# Allegro board ECG.brd
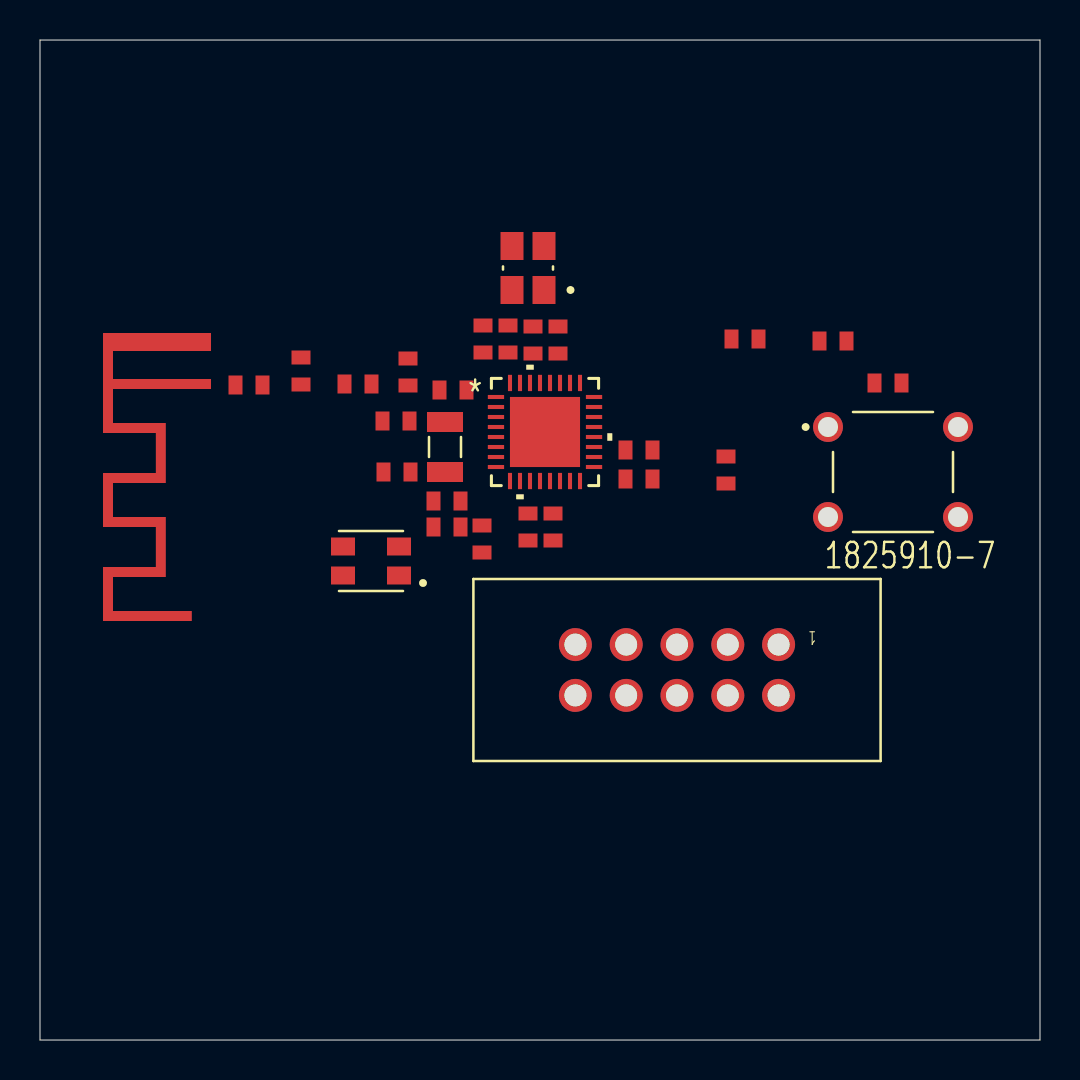
[diagram p0: board, top side]
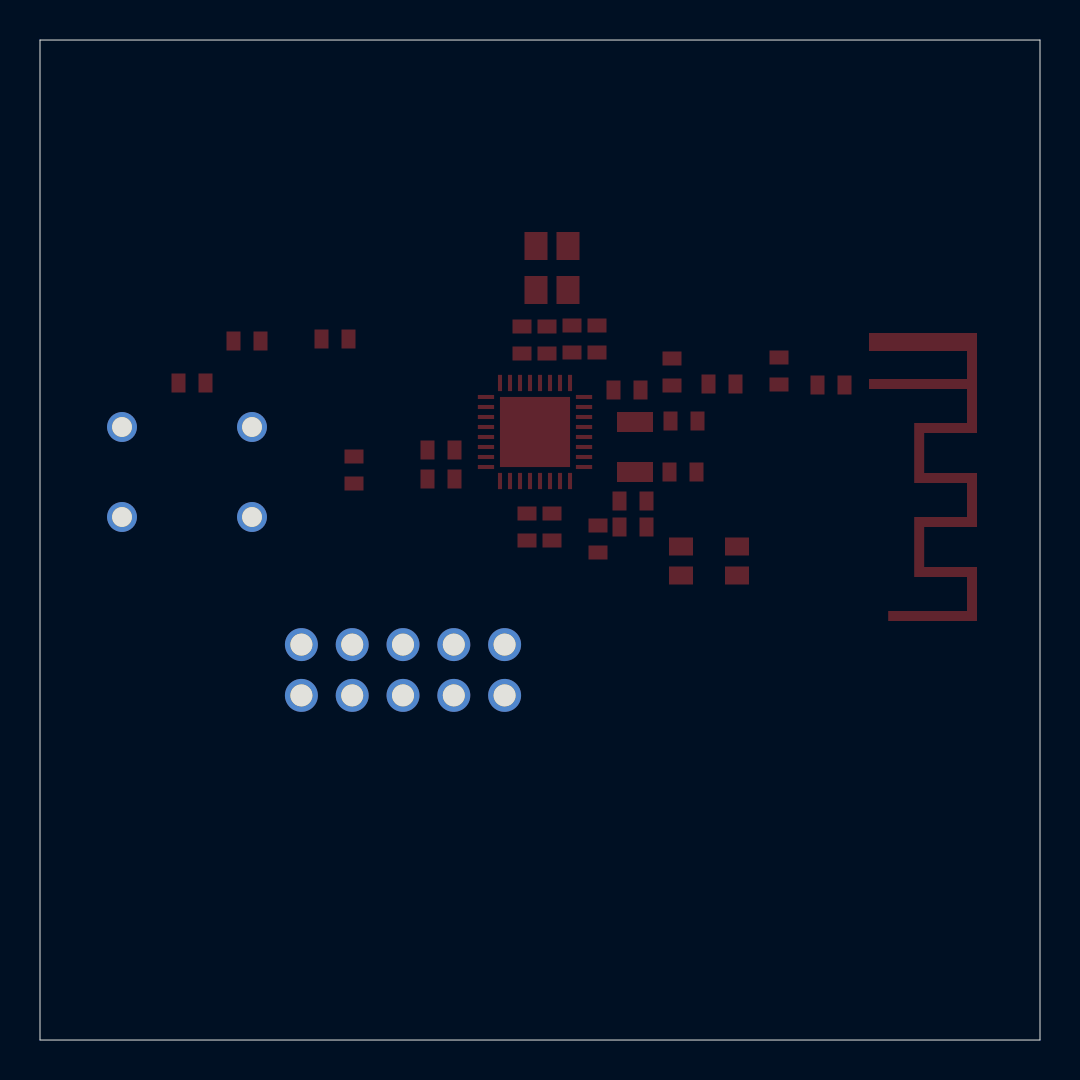
[diagram p1: board, bottom side, seen from below]

Outline 50 x 50 mm; copper layers: TOP, BOTTOM. Coordinates in mm from the lower left corner of the outline.
Outline path: 0,50 0,0 50,0 50,50 0,50

## Design rules (mm)
constraint set DEFAULT: min track width 0.127

## Placement (name value [footprint] x y rotation side)
A1  Anteena  [AN043_PATCH_ANTENNA]  8.05 35.85 90 top
C1  100nF  [0603_C]  39.65 34.95 0 top
C2  12 pF  [0603_C]  17.8 30.95 0 top
C3  12 pF  [0603_C]  17.85 28.4 0 top
C4  12 pF  [0603_C]  10.45 32.75 0 top
C5  1.2 pF  [0603_C]  18.4 33.4 270 top
C6  1.2 pF  [0603_C]  13.05 33.45 270 top
C7  1 uF  [0603_C]  25.65 25.65 90 top
C8  100 nF  [0603_C]  24.4 25.65 90 top
C9  100 nF  [0603_C]  25.9 35 270 top
C10  10 uF  [0603_C]  29.95 29.5 180 top
C11  100 nF  [0603_C]  34.3 28.5 90 top
C12  10 uF  [0603_C]  23.4 35.05 270 top
C13  100 nF  [0603_C]  24.65 35 270 top
C14  100 nF  [0603_C]  22.15 35.05 270 top
D1  RGB  [RGB_LED]  16.55 23.95 180 top
J1  5X5  [HEADER4X2]  31.85 18.5 180 top
L1  15 nH  [0603_L]  20.65 32.5 0 top
L2  2 nH  [0603_L]  15.9 32.8 180 top
L3  10 uH  [0603_L]  29.95 28.05 0 top
R1  330  [0603_R]  20.35 26.95 180 top
R2  570  [0603_R]  22.1 25.05 270 top
R3  750  [0603_R]  20.35 25.65 180 top
R4  10k  [0603_R]  35.25 35.05 0 top
R5  330  [0603_R]  42.4 32.85 0 top
S2  1825910-7  [SW_PB]  42.65 28.4 0 top
U1  CC2640R2LRHBR  [CC2640]  25.25 30.4 0 top
Y1  TSX-3225_240000MF20X-AC0  [XTAL_24MHZ]  24.4 38.6 180 top
Y2  FC-135R_327680KA-AG0  [XTAL_32_768KHZ]  20.25 29.65 270 top

## Library data of the parts
A1 = Anteena_0
C1 = C
C2-C14 = Capacitor
D1 = XZM2CRKM2DGFBB45SCCB
J1 = 5X5
L1-L3 = Inductor
R1-R5 = R
S2 = 1825910-7
U1 = CC2640R2LRHBR: User Part Number: PN; Tolerance: TOL
Y1 = TSX-3225_240000MF20X-AC0
Y2 = FC-135R_327680KA-AG0

## Footprints (pads in the part's own frame, mm; a bottom-side part is the same pattern mirrored in y, then rotated)
0603_C
  rect 0.7x0.95 smd: 1(-0.675,0) 2(0.675,0)
0603_L
  rect 0.7x0.95 smd: 1(-0.675,0) 2(0.675,0)
0603_R
  rect 0.7x0.95 smd: 1(-0.675,0) 2(0.675,0)
AN043_PATCH_ANTENNA
  rect 0.9x0.5 smd: 1(-0.95,-0.25)
  rect 0.5x0.5 smd: 2(-3.05,-0.25)
CC2640
  rect 0.813x0.203 smd: 1(-2.451,1.75) 2(-2.451,1.25) 3(-2.451,0.75) 4(-2.451,0.25) 5(-2.451,-0.25) 6(-2.451,-0.75) 7(-2.451,-1.25) 8(-2.451,-1.75) 17(2.451,-1.75) 18(2.451,-1.25) 19(2.451,-0.75) 20(2.451,-0.25) 21(2.451,0.25) 22(2.451,0.75) 23(2.451,1.25) 24(2.451,1.75)
  rect 0.203x0.813 smd: 9(-1.75,-2.451) 10(-1.25,-2.451) 11(-0.75,-2.451) 12(-0.25,-2.451) 13(0.25,-2.451) 14(0.75,-2.451) 15(1.25,-2.451) 16(1.75,-2.451) 25(1.75,2.451) 26(1.25,2.451) 27(0.75,2.451) 28(0.25,2.451) 29(-0.25,2.451) 30(-0.75,2.451) 31(-1.25,2.451) 32(-1.75,2.451)
  rect 3.505x3.505 smd: 33(0,0)
HEADER4X2
  round 1.65 hole 1.1: 1(-5.08,-1.27) 2(-5.08,1.27) 3(-2.54,-1.27) 4(-2.54,1.27) 5(0,-1.27) 6(0,1.27) 7(2.54,-1.27) 8(2.54,1.27) 9(5.08,-1.27) 10(5.08,1.27)
RGB_LED
  rect 1.2x0.9 smd: 1(-1.4,0.725) 2(1.4,0.725) 3(1.4,-0.725) 4(-1.4,-0.725)
SW_PB
  round 1.498 hole 0.99: 1(-3.25,2.25) 2(3.25,2.25) 3(-3.25,-2.25) 4(3.25,-2.25)
XTAL_24MHZ
  rect 1.15x1.4 smd: 1(-0.8,1.1) 2(-0.8,-1.1) 3(0.8,-1.1) 4(0.8,1.1)
XTAL_32_768KHZ
  rect 1x1.8 smd: 1(-1.25,0) 2(1.25,0)

## Nets
3.3V: C8.2(B) C9.2(B) C10.2(B) C11.2(B) U1.11 U1.18 U1.28
GND: A1.1(GND) C1.2 C2.1 C3.1 C5.1 C6.1 C7.1 C8.1 C9.1 C10.1 C11.1 C12.1 C13.1 C14.1 D1.4 J1.1 J1.3 R4.1 S2.4 U1.33 Y1.2 Y1.4(GND#4)
VDD: J1.5
VDDR: C12.2(B) C13.2(B) C14.2(B) L3.2(B) U1.29 U1.32
DCDC_SW: L3.1 U1.17
DCOUPL: C7.2(B) U1.12
ECG: U1.21
JTAG_TCKC: J1.9 U1.14
JTAG_TDI: J1.7 U1.16
JTAG_TDO: J1.8 U1.15
JTAG_TMSC: J1.10 U1.13
RESET_N: C1.1 J1.6 R4.2 R5.1 U1.19
RF_N: L1.1 U1.2
RF_P: C5.2(B) L1.2(B) L2.1 U1.1
RGB_BLUE: R1.1 U1.6
RGB_GREEN: R2.1 U1.8
RGB_RED: R3.1 U1.7
X24_N: U1.30 Y1.3
X24_P: U1.31 Y1.1
X32K_Q1: C2.2(B) U1.4 Y2.1
X32K_Q2: C3.2(B) U1.5(X32K_Q2) Y2.2
N71434: C4.2(B) C6.2(B) L2.2(B)
N71446: A1.2 C4.1
N81014: D1.1(R_A) R3.2
N81018: D1.2 R2.2
N81022: D1.3 R1.2
N81339: R5.2 S2.1

Pads without a net: J1 2 4; S2 2 3; U1 3 9 10 20 22 23 24 25 26 27

## Copper pours and planes (outline as drawn; the poured copper is in the pictures)
Net_1 on TOP (solid shape): 8.05,34.45 3.65,34.45 3.65,33.05 8.05,33.05 8.05,32.55 3.65,32.55 3.65,30.85 6.29,30.85 6.29,27.85 3.65,27.85 3.65,26.15 6.29,26.15 6.29,23.15 3.65,23.15 3.65,21.45 7.59,21.45 7.59,20.95 3.15,20.95 3.15,23.65 5.79,23.65 5.79,25.65 3.15,25.65 3.15,28.35 5.79,28.35 5.79,30.35 3.15,30.35 3.15,35.35 8.05,35.35
